# Altium PCB DATN_IoT_Node_PCB.PcbDoc
Units mil, origin at the board's own origin, x right, y up, seen from the top; angles counter-clockwise.
Board outline 3925 x 3935 mil, 2 copper layers (Top Layer, Bottom Layer); 113 components, 71 nets, 345 pads, 45 vias.
Unrouted connection lines stored in the file: 1.
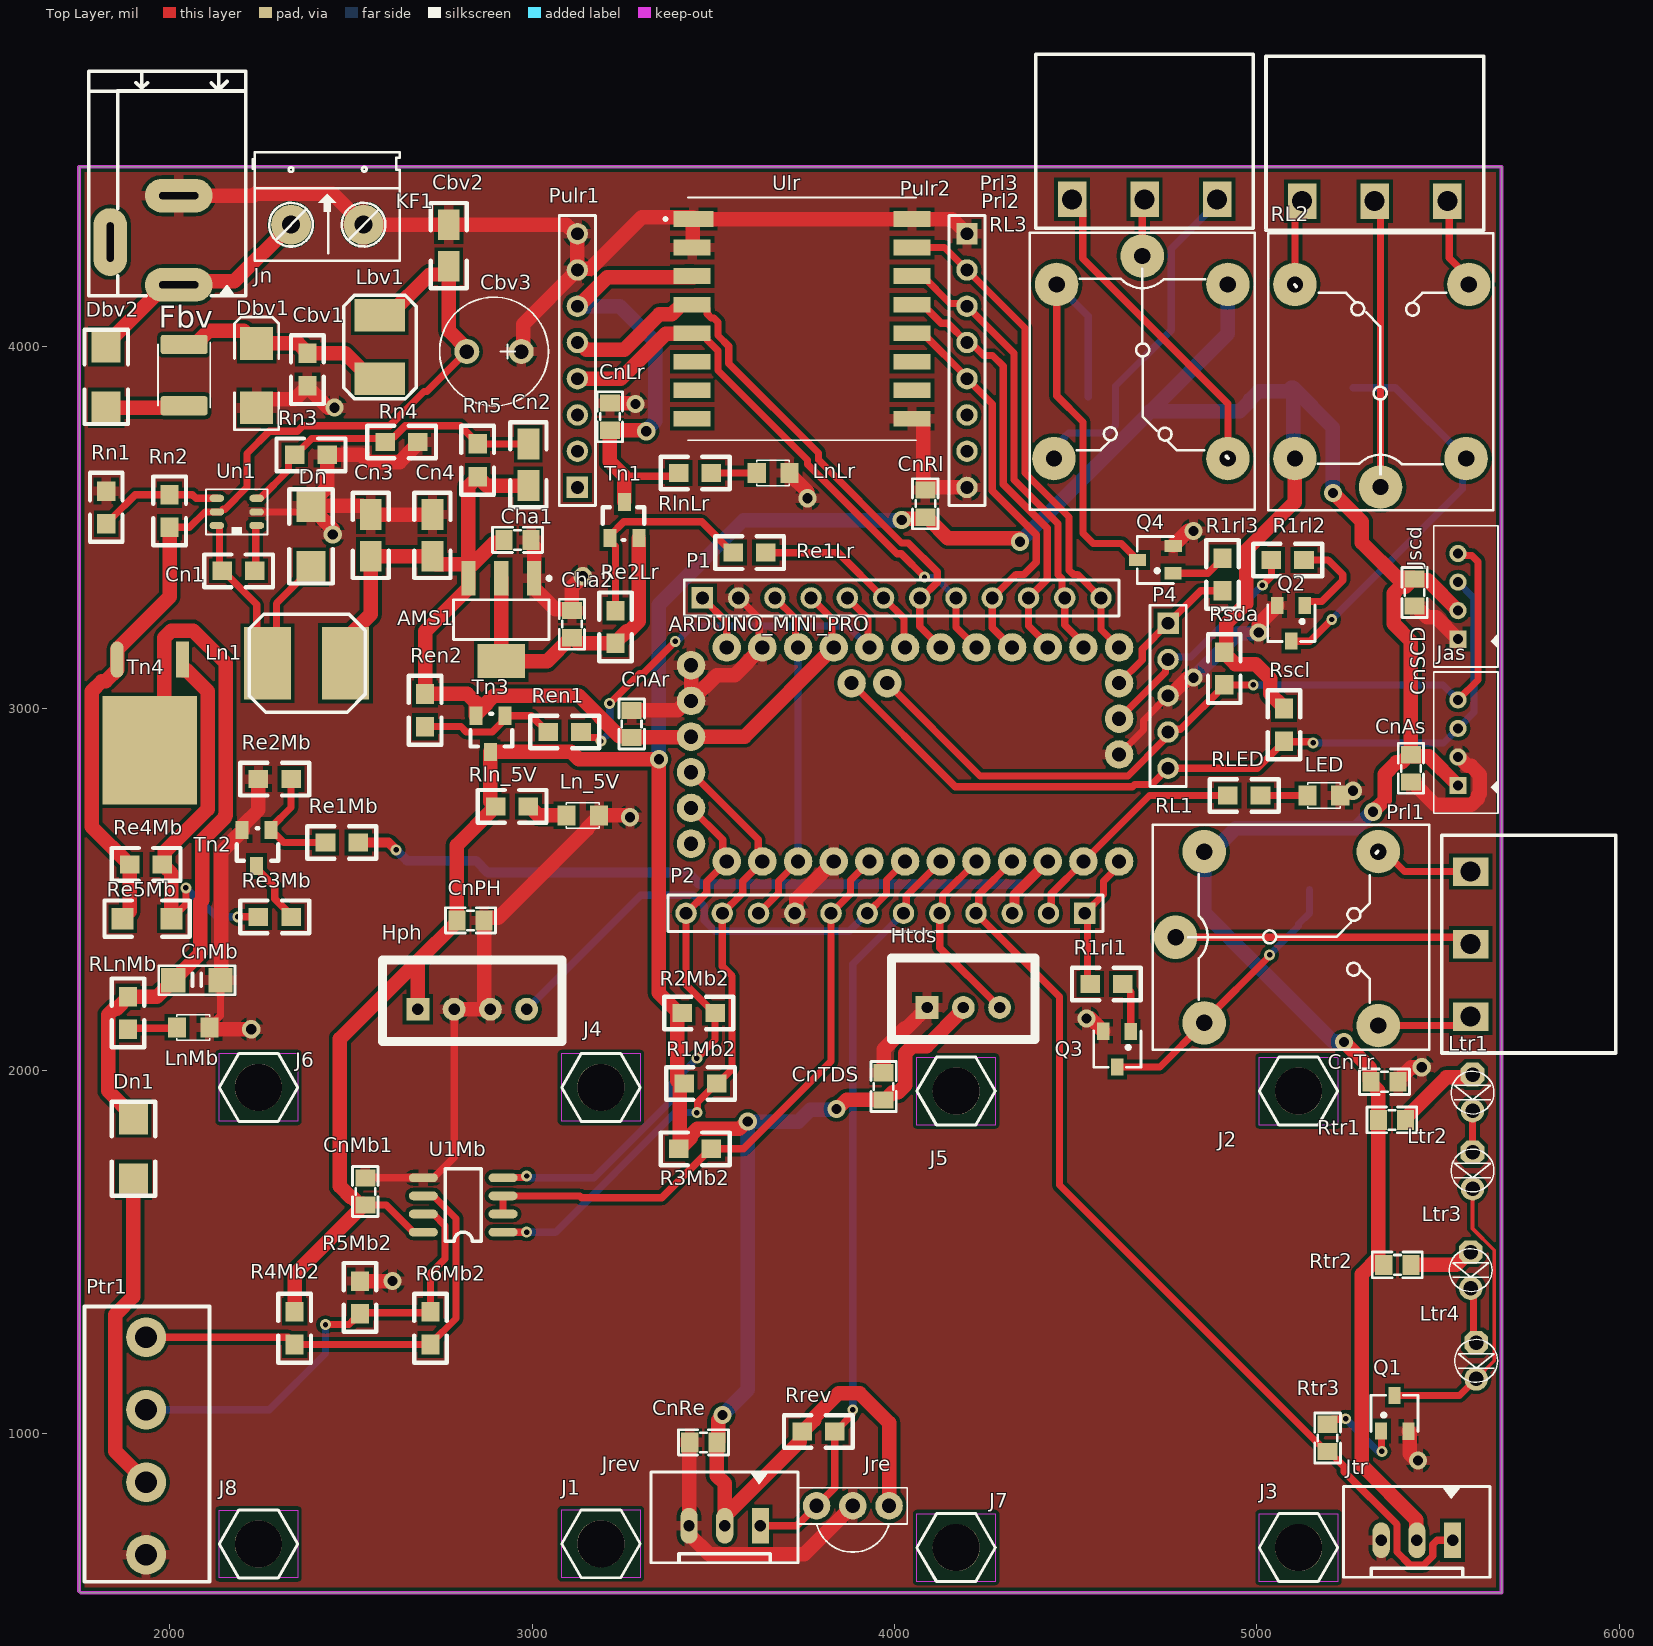
[diagram p0: Top Layer view]
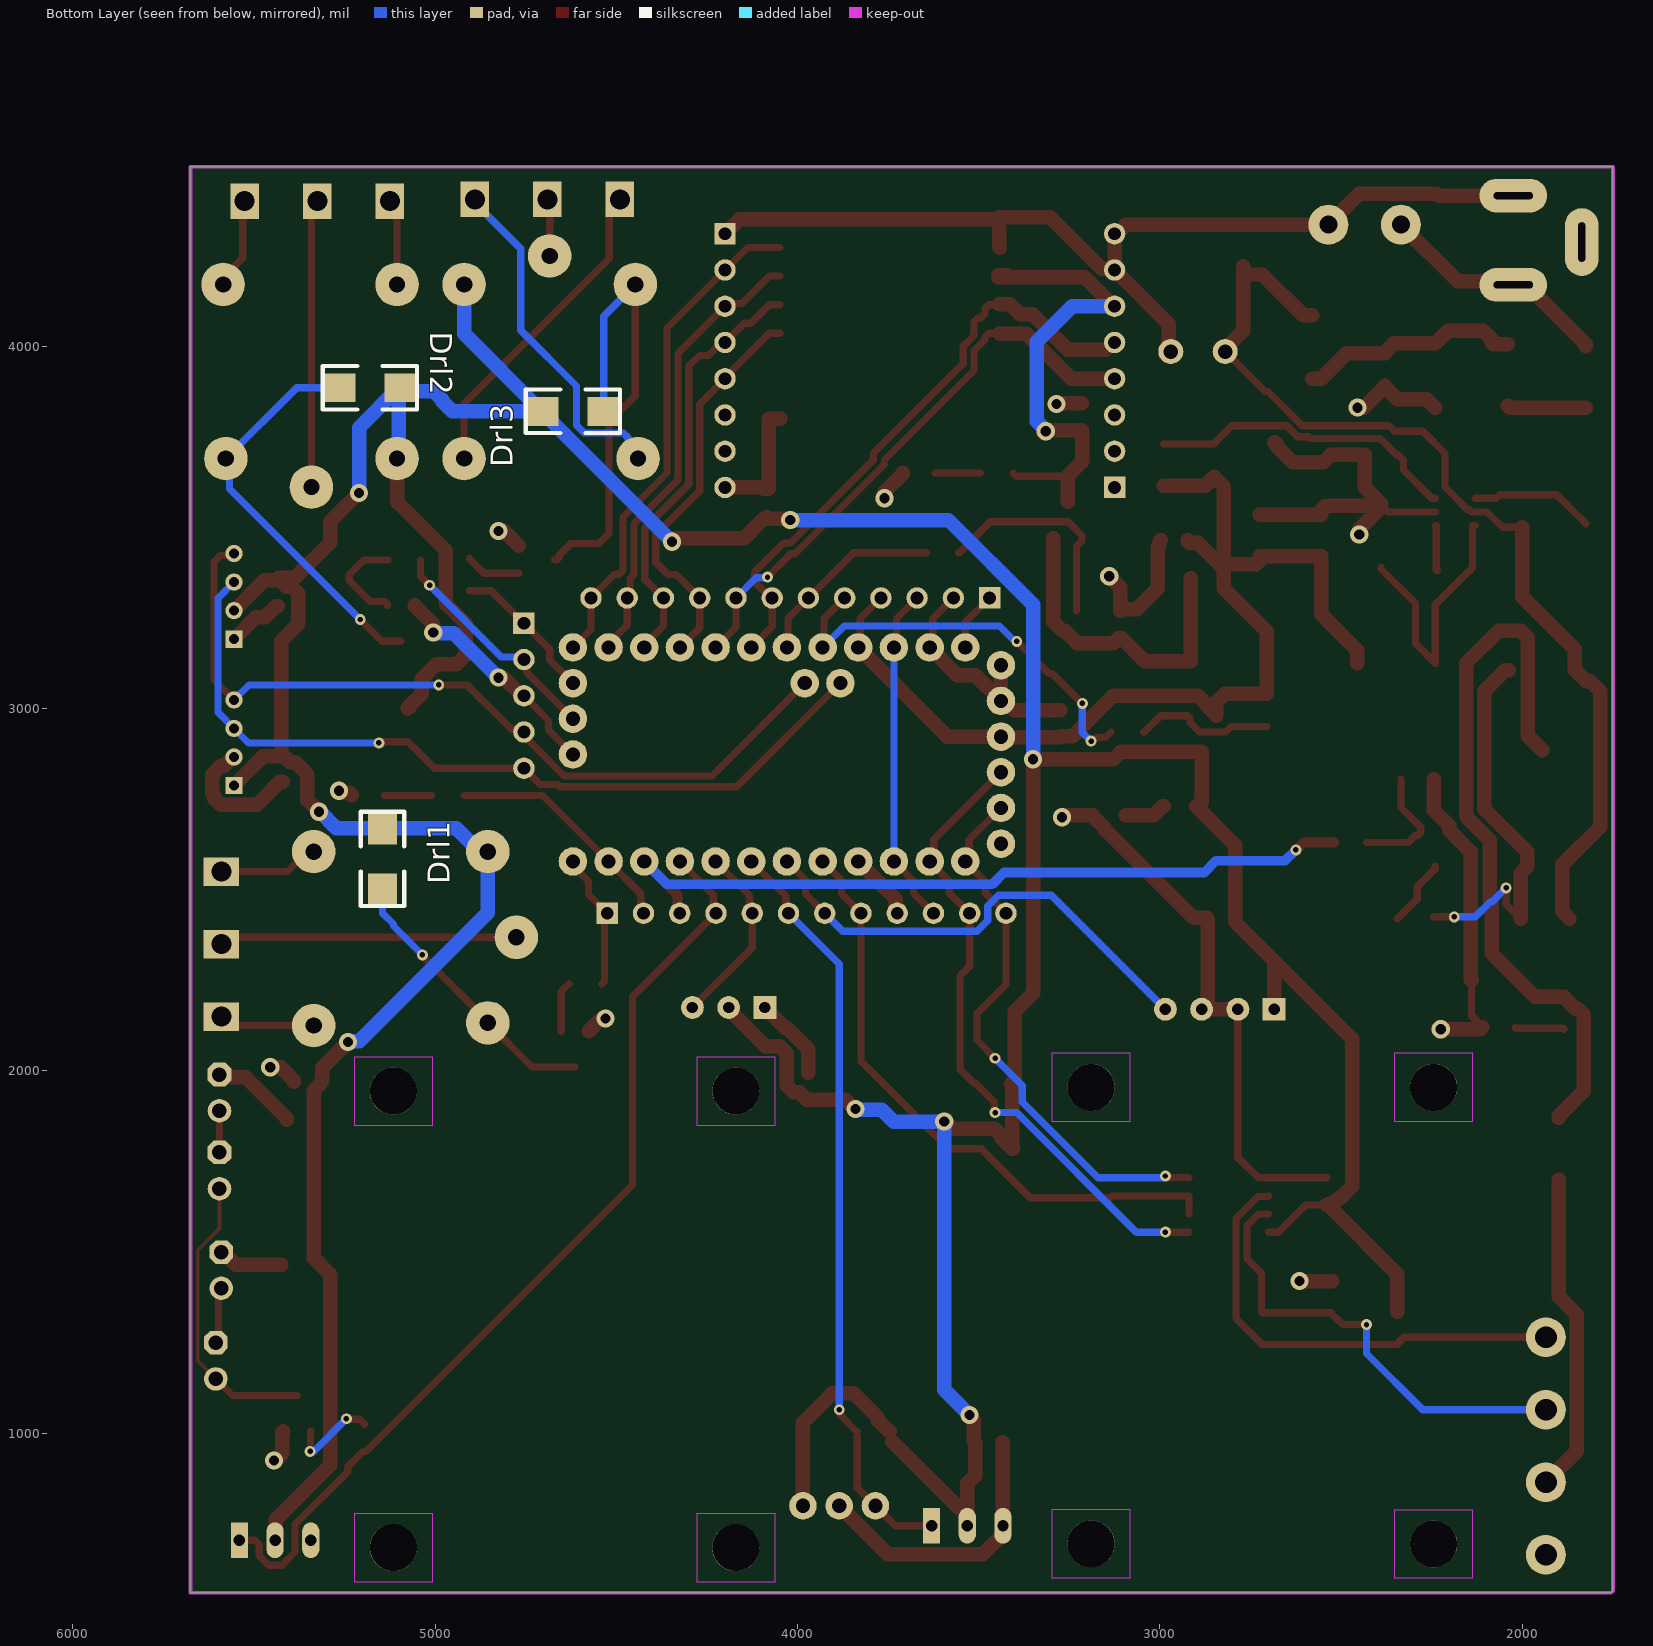
[diagram p1: Bottom Layer view, seen from below]

## Layer stack, top to bottom
Top Solder: solder mask 0.4, Solder Resist, Dk 3.5
Top Layer: signal copper 1.4
Dielectric 1: dielectric 12.6, FR-4, Dk 4.8
Bottom Layer: signal copper 1.4
Bottom Solder: solder mask 0.4, Solder Resist, Dk 3.5

## Board outline
1750,565 1750,4495 5675,4495 5675,560 1755,560

## Design rules (kind name [scope] priority, off if disabled: settings)
Clearance Clearance_1 [All] p1: gap=10 ignorepadtopadclearanceinfootprint=FALSE except(0: Arc-Hole Track-Hole SMDPad-Hole THPad-Fill THPad-Poly THPad-Region THPad-Hole Via-Hole Fill-Hole Poly-Hole Region-Hole Text-Hole)
Clearance Clearance_GND [InNet('GND')] p2: gap=13 ignorepadtopadclearanceinfootprint=FALSE except(0: Arc-Hole Track-Hole SMDPad-Hole THPad-Hole Via-Hole Fill-Hole Poly-Hole Region-Hole Text-Hole)
HoleSize [All] p1: absolutevalues=TRUE maxlimit=200 minlimit=1 maxpercent=80.000 minpercent=20.000
MinimumSolderMaskSliver [All] p1: minsoldermaskwidth=0
PolygonConnect [All] p1: connectstyle=Relief reliefconductorwidth=27 reliefentries=4 polygonreliefangle="90 Angle" airgapwidth=10
RoutingVias [All] p1: holewidth=15 width=30 viastyle="Through Hole" minholewidth=10 minwidth=20 maxholewidth=48 maxwidth=150
SilkToSilkClearance [All] p1: silktosilkclearance=0
SilkToSolderMaskClearance [IsPad] p1: minsilkscreentomaskgap=0 clearancetoexposedcopper=TRUE
SolderMaskExpansion SolderMaskExpansion_1 [All] p1: expansion=4 istentingtop=FALSE
SolderMaskExpansion [IsVia] p2: expansion=4 istentingtop=FALSE
Width [All] p1: maxlimit=40 minlimit=10 preferedwidth=20
26 further rules are at their usual default settings.

## Components (designator, comment, footprint, x,y, rotation, side; value= is the part's Value field where it differs from the comment)
AMS1 "AMS1117-3.3V" SOT223 2915,3245 r180 top value="AMS1117-3.3V SOT223"
ARDUINO_MINI_PRO "ARDUINO_MINI_PRO" ARDUINO_MINI_PRO 3596.14,2676.3 r90 top
Cbv1 "104" 0805c 2380,3980 r270 top value=100pF
Cbv2 "CAP" 1206e 2770,4220 r90 top
Cbv3 "CAPACITOR" cc15r15 2820,3985 r0 top
Cha1 "47uF" "Cap 0805" 2960,3465 r0 top
Cha2 "33uF" "Cap 0805" 3109.87,3232.43 r90 top
Cn1 "Cap" 0805c 2235,3380 r180 top value=100pF
Cn2 "100pF" 1206e 2990,3615 r90 top
Cn3 "CAP" 1206e 2555,3420 r90 top
Cn4 "CAP" 1206e 2725,3420 r90 top
CnAr "CAP" "Cap 0805" 3274.87,2957.23 r90 top
CnAs "CAP" "Cap 0805" 5425,2835 r270 top
CnLr "CAP" "Cap 0805" 3215,3805 r90 top
CnMb "CAP" "Cap 1206" 2075,2250 r0 top
CnMb1 "CAP" "Cap 0805" 2539.87,1667.23 r90 top
CnPH "CAP" "Cap 0805" 2830,2415 r0 top
CnRe "CAP" "Cap 0805" 3472.77,974.87 r180 top
CnRl "CAP" "Cap 0805" 4085,3565 r90 top
CnSCD "CAP" "Cap 0805" 5435,3320 r270 top
CnTDS "CAP" "Cap 0805" 3969.87,1957.23 r90 top
CnTr "CAP" "Cap 0805" 5352.23,1970.13 r0 top
Dbv1 "DIODE" smb 2240,3918.58 r90 top
Dbv2 "DIODE" sma 1825,4000 r270 top
Dn "Diode" Sma 2390,3560 r270 top
Dn1 "Diode" Sma 1900,1870 r270 top
Drl1 "DIODE" sma 5145,2500 r90 bottom
Drl2 "DIODE" sma 5265,3885 r180 bottom
Drl3 "DIODE" sma 4535,3820 r0 bottom
Fbv "2A 24V" "Cau chi tu phuc hoi 2A 24V SMD1812" 2040,3920 r270 top
Hph "Header 4P 2.54 Duc Thang" XH2.54M-4 2685,2170 r0 top
Htds "Header 3P 2.54 Duc Thang" XH2.54M-3 4090,2175 r0 top
J1 "SO-3015-03-03-02-N" SAMTEC_SO-3015-03-03-02-N#1 3190,695 r0 top locked
J2 "SO-3015-03-03-02-N" SAMTEC_SO-3015-03-03-02-N#1 5115,1944.37 r0 top locked
J3 "SO-3015-03-03-02-N" SAMTEC_SO-3015-03-03-02-N#2 5115,684.53 r0 top locked
J4 "SO-3015-03-03-02-N" SAMTEC_SO-3015-03-03-02-N#1 3190,1954.37 r0 top locked
J5 "SO-3015-03-03-02-N" SAMTEC_SO-3015-03-03-02-N#1 4170.12,1944.37 r0 top locked
J6 "SO-3015-03-03-02-N" SAMTEC_SO-3015-03-03-02-N#1 2245.12,1954.37 r0 top locked
J7 "SO-3015-03-03-02-N" SAMTEC_SO-3015-03-03-02-N#1 4170.12,684.53 r0 top locked
J8 "SO-3015-03-03-02-N" SAMTEC_SO-3015-03-03-02-N#1 2245.12,694.53 r0 top locked
Jas "B4B-PH-K-S(LF)(SN)" CON4_78_B4B-PH-K-S(LF)(SN) 5555,2787.52 r270 top
Jn "DC -JACK" CON3_129_PJ-002A_TH_RA 2025,4169 r270 top
Jre "TSOP1838" TSOP1838 3885,800 r0 top
Jrev "B3B-XH-A(LF)(SN)" CON3_100_B3B-XH-A_TH_ST 3338.66,882.8 r270 top
Jscd "B4B-PH-K-S(LF)(SN)" CON4_78_B4B-PH-K-S(LF)(SN) 5555,3191.26 r270 top
Jtr "B3B-XH-A(LF)(SN)" CON3_100_B3B-XH-A_TH_ST 5248.66,842.8 r270 top
KF1 "CON 2 KF301" "Con 2 KF301 5.08" 2335,4335 r0 top
Lbv1 "INDUCTOR" IND_SPR05x 2580,3910 r90 top
LED "LED 0805" LED-0805-Yellow 5140,2760 r0 top
Ln1 "Inductor" IND_SPR06xe 2270,3125 r0 top value=10mH
Ln_5V "LED 0805" LED-0805-Red 3095,2705 r0 top
LnLr "LED 0805" LED-0805-Orange 3620,3650 r0 top
LnMb "LED 0805" LED-0805-Yellow 2020,2120 r0 top
Ltr1 "LED 3mm" LED-3MM-RED 5595,1990 r270 top
Ltr2 "LED 3mm" LED-3MM-RED 5595,1775 r270 top
Ltr3 "LED 3mm" LED-3MM-RED 5590,1500 r270 top
Ltr4 "LED 3mm" LED-3MM-RED 5605,1250 r270 top
P1 "Header 12" HDR1X12 3470,3305 r0 top
P2 "Header 12" HDR1X12 4525,2435 r180 top
P4 "Header 5" HDR1X5 4755,3235 r270 top
Prl1 "CON 3 EDG5.08" "CON 3 3EDG5.08" 5590,2550 r270 top
Prl2 "CON 3 EDG5.08" "CON 3 3EDG5.08" 5125,4400 r0 top
Prl3 "CON 3 EDG5.08" "CON 3 3EDG5.08" 4490,4405 r0 top
Ptr1 "Header 4" giacdung4 1935,865 r90 top
Pulr1 "Header 8" HDR1X8 3125,3610 r90 top locked
Pulr2 "Header 8" HDR1X8 4200,4310 r270 top locked
Q1 "HF" SOT-23 5380,1055 r0 top value=C9014
Q2 "HF" SOT-23 5095,3235 r180 top value=C9014
Q3 "HF" SOT-23 4615,2060 r180 top value=C9014
Q4 "HF" SOT-23 4720,3410 r90 top value=C9014
R1Mb2 "Res1" 0805c 3420,1965 r0 top value=10K
R1rl1 "Res1" 0805c 4540,2240 r0 top value=1K
R1rl2 "Res1" 0805c 5040,3410 r0 top value=1K
R1rl3 "Res1" 0805c 4905,3325 r90 top value=1K
R2Mb2 "Res1" 0805c 3415,2160 r0 top value=10K
R3Mb2 "Res1" 0805c 3405,1785 r0 top value=10K
R4Mb2 "Res1" 0805c 2345,1335 r270 top value=20K
R5Mb2 "Res1" 0805c 2525,1420 r270 top value=20K
R6Mb2 "Res1" 0805c 2720,1335 r270 top value=120
Re1Lr "10k" 0805c 3645,3430 r180 top
Re1Mb "10k" 0805c 2520,2630 r180 top
Re2Lr "1k" 0805c 3230,3270 r270 top
Re2Mb "1k" 0805c 2245,2805 r0 top
Re3Mb "10k" 0805c 2335,2425 r180 top
Re4Mb "10k" 0805c 1890,2570 r0 top
Re5Mb "z10V" 1206 1870,2420 r0 top
Ren1 "10k" 0805c 3135,2935 r180 top
Ren2 "1k" 0805c 2705,2950 r90 top
RL1 "Relay" "Relay 5 Chan SRD" 4775.94,2368.78 r0 top
RL2 "Relay" "Relay 5 Chan SRD" 5341.22,3610.94 r90 top
RL3 "Relay" "Relay 5 Chan SRD" 4683.78,4248.74 r270 top
RLED "Res1" 0805c 5010,2760 r180 top value=1K
Rln_5V "Res1" 0805c 2990,2730 r180 top value=1K
RlnLr "Res1" 0805c 3495,3650 r180 top value=1K
RLnMb "Res1" 0805c 1885,2115 r90 top value=1K
Rn1 "Res1" 0805c 1825,3600 r270 top value=1K
Rn2 "Res1" 0805c 2000,3500 r90 top value=1K
Rn3 "Res1" 0805c 2435,3700 r180 top value=1K
Rn4 "Res1" 0805c 2685,3735 r180 top value=1K
Rn5 "Res1" 0805c 2850,3640 r90 top value=1K
Rrev "Res1" 0805c 3835,1005 r180 top value=1K
Rscl "Res1" 0805c 5075,2910 r90 top value=1K
Rsda "Res1" 0805c 4910,3065 r90 top value=1K
Rtr1 "30R" "tro smd 0805" 5372.43,1867.39 r0 top
Rtr2 "30R" "tro smd 0805" 5387.43,1467.39 r0 top
Rtr3 "220R" "tro smd 0805" 5192.61,987.23 r90 top
Tn1 "ao3401" sot23-3 3215,3470 r0 top
Tn2 "c1815" sot23-3 2280,2665 r180 top
Tn3 "ao3401" sot23-3 2925,2980 r180 top
Tn4 "CON3" dpak 2035,3135 r180 top
U1Mb "MAX485" so-8 2920,1555 r180 top
Ulr "RA-02_LORA" MODULE_RA-02_LORA 3745,4075 r0 top
Un1 "AOZ1282CI" Sot23-6 2180.59,3537.4 r180 top

## Footprints (in the part's own frame and the unit in brackets; to place one, negate y for a bottom-side part, rotate by r counter-clockwise, add the part's x,y. Pads: shape width x height; smd on the part's side, far side on the other; paste and mask are expansions set on the pad)
0805c [mil]
  rect 54x50 smd: 1(0,0) 2(90,0)
  silkscreen extent -50,-45 140,45
1206 [mil]
  rect 60x60 smd: 1(0,0) 2(135,0)
  silkscreen extent -50,-50 185,50
1206e [mil]
  rect 85x60 smd: 1(0,0) 2(115,0)
  silkscreen extent -60,-50 175,50
ARDUINO_MINI_PRO [mm]
  round 2 hole 1: 2(-2.5,-8.5) 3(-2.5,-11) 4(-2.5,-13.5) 5(-2.5,-16) 6(-2.5,-18.5) 7(-2.5,-21) 8(-2.5,-23.5) 9(-2.5,-26) 10(12.5,-26) 11(12.5,-23.5) 12(12.5,-21) 13(12.5,-18.5) A0(12.5,-16) A1(12.5,-13.5) A2(12.5,-11) A3(12.5,-8.5) A4(10,-9.75) A5(10,-7.25) A6(7.5,-26) A7(10,-26) DTR(-1.25,4) GND(-2.5,-6) GND(5,-26) GND(8.75,4) GND(11.25,4) GND(12.5,-1) RAW(12.5,1.5) RST(-2.5,-3.5) RST(12.5,-3.5) RX(-2.5,-1) RX(3.75,4) TX(-2.5,1.5) TX(1.25,4) VCC(6.25,4) VCC(12.5,-6)
"Cap 0805" [mm] "Compoment SMD 80x50mil"
  rect 1.2x1.4 smd: 1(-0.946,-0.003) 2(0.954,-0.003)
  silkscreen extent -1.75,-0.89 1.75,0.89, body extent -0.97,-0.61 1.03,0.64, height 1.23
"Cap 1206" [mm]
  rect 1.7x1.7 smd: 1(-1.65,0) 2(1.65,0)
  silkscreen extent -2.67,-1.02 2.67,1.02, body extent -1.6,-0.8 1.6,0.8, height 1.02
"Cau chi tu phuc hoi 2A 24V SMD1812" [mm]
  rrect25% 1.34x3.29 smd: 1(-2.15,0) 2(2.15,0)
  silkscreen extent -2.28,-1.83 2.28,1.83, body extent -2.27,-1.62 2.27,1.62, height 1.25
cc15r15 [mil]
  round 69 hole 40: 1(0,0) 2(150,0)
  silkscreen extent -75,-150 225,150
CON3_100_B3B-XH-A_TH_ST [mm] "Connector Header"
  rect 2.5x1.2 hole 0.8: 1(3.5,7.4)
  oval 2.5x1.2 hole 0.8: 2(3.5,4.9) 3(3.5,2.4)
  silkscreen extent -0.25,-0.25 6.1,10.03, body extent 0.02,-0.05 5.78,9.85, height 7.01
CON3_129_PJ-002A_TH_RA [mm] "DC JACK"
  oval 2.35x4.75 hole 0.5 slot 2.75 at 90 deg: 1(0,0) 2(-6.248,0)
  oval 4.75x2.35 hole 2.75 slot 0.5 at 90 deg: 3(-2.997,-4.801)
  silkscreen extent -14.98,-6.3 0.81,4.7, body extent -13.92,-4.93 0.48,4.47, height 11.01
CON4_78_B4B-PH-K-S(LF)(SN) [mm] "JST TH"
  rect 1.208x1.208 hole 0.7: 1(0,0)
  round 1.208 hole 0.7: 2(-2,0) 3(-4,0) 4(-6,0)
  silkscreen extent -7.95,-1.7 1.95,2.8, body extent -7.95,-1.7 1.95,2.8, height 6
"Con 2 KF301 5.08" [mil]
  round 110 hole 50: 1(0,0) 2(200,0)
  silkscreen extent -106,-100 300,200, body extent -45,-97 255,190, height 335
"CON 3 3EDG5.08" [mm]
  rect 2x2.5 hole 1.4: 1(0,0) 2(5.08,0) 3(10.173,0)
  silkscreen extent -2.54,-2.03 12.71,10.16, body extent -2.5,-1.75 12.67,10.25, height 3.15
dpak [mil]
  rect 36x100 smd: 1(0,0)
  rect 260x300 smd: 2(90,250)
  oval 36x100 smd: 3(180,0)
giacdung4 [mil]
  round 110 hole 60: 1(-200,0) 2(0,0) 3(200,0) 4(400,0)
  silkscreen extent -275,-175 485,170
HDR1X5 [mm] "Connector; Header; 5 Position"
  rect 1.5x1.5 hole 0.9: 1(0,0)
  round 1.5 hole 0.9: 2(2.54,0) 3(5.08,0) 4(7.62,0) 5(10.16,0)
  silkscreen extent -1.27,-1.27 11.43,1.27
HDR1X8 [mm] "Connector; Header; 8 Position"
  rect 1.5x1.5 hole 0.9: 1(0,0)
  round 1.5 hole 0.9: 2(2.54,0) 3(5.08,0) 4(7.62,0) 5(10.16,0) 6(12.7,0) 7(15.24,0) 8(17.78,0)
  silkscreen extent -1.27,-1.27 19.05,1.27
HDR1X12 [mm] "Connector; Header; 12 Position"
  rect 1.5x1.5 hole 0.9: 1(0,0)
  round 1.5 hole 0.9: 2(2.54,0) 3(5.08,0) 4(7.62,0) 5(10.16,0) 6(12.7,0) 7(15.24,0) 8(17.78,0) 9(20.32,0) 10(22.86,0) 11(25.4,0) 12(27.94,0)
  silkscreen extent -1.27,-1.27 29.21,1.27
IND_SPR05x [mil]
  rect 90x140 smd: 1(0,0) 2(175,0)
  silkscreen extent -55,-100 230,100
IND_SPR06xe [mil]
  rect 130x200 smd: 1(0,0) 2(215,0)
  silkscreen extent -50,-135 270,135
LED-3MM-RED [mil]
  oct 65x65 hole 40: 1(0,0)
  round 65 hole 40: 2(100,0)
  silkscreen extent -9,-59 109,59, body extent -27,-77 117,80, height 181
LED-0805-Orange [mil]
  rect 50x55 smd: 1(0,0) 2(90,0)
  silkscreen extent 0,-35 90,35, body extent 5,-25 85,25, height 43
LED-0805-Red [mil]
  rect 50x55 smd: 1(0,0) 2(90,0)
  silkscreen extent 0,-35 90,35, body extent 5,-25 85,25, height 43
LED-0805-Yellow [mil]
  rect 50x55 smd: 1(0,0) 2(90,0)
  silkscreen extent 0,-35 90,35, body extent 5,-25 85,25, height 43
MODULE_RA-02_LORA [mm]
  rect 2.8x1.1 smd: 1(-7.6,7)
  rect 2.6x1.1 smd: 2(-7.7,5) 3(-7.7,3) 4(-7.7,1) 5(-7.7,-1) 6(-7.7,-3) 7(-7.7,-5) 8(-7.7,-7) 9(7.7,-7) 10(7.7,-5) 11(7.7,-3) 12(7.7,-1) 13(7.7,1) 14(7.7,3) 15(7.7,5) 16(7.7,7)
  silkscreen extent -9.68,-8.5 8,8.5
"Relay 5 Chan SRD" [mil] "Relay SPDT, 5 pin, 10A,W 650mil, L 800mil, H 800mil"
  round 120 hole 45: 1(0,0) 2(559.06,236.22) 3(559.06,-243.78) 4(78.74,-236.22) 5(78.74,236.22)
  silkscreen extent -63,-311 700,310, body extent -55,-306 697,304, height 602
SAMTEC_SO-3015-03-03-02-N#1 [mm]
  round 3.3 hole 3.3 unplated mask+0: ""(0,0)
  Keep-Out Layer region: 2.75,-2.38 -2.75,-2.38 -2.75,2.38 2.75,2.38
  Keep-Out Layer region: 2.75,-2.38 -2.75,-2.38 -2.75,2.38 2.75,2.38
  silkscreen extent -2.75,-2.38 2.75,2.38
SAMTEC_SO-3015-03-03-02-N#2 [mm]
  round 3.3 hole 3.3 unplated: ""(0,0)
  Keep-Out Layer region: 2.75,-2.38 -2.75,-2.38 -2.75,2.38 2.75,2.38
  Keep-Out Layer region: 2.75,-2.38 -2.75,-2.38 -2.75,2.38 2.75,2.38
  silkscreen extent -2.75,-2.38 2.75,2.38
sma [mil]
  rect 90x80 smd: 1(0,0) 2(170,0)
  silkscreen extent -45,-60 215,60
Sma [mil]
  rect 90x80 smd: 1(0,0) 2(170,0)
  silkscreen extent -45,-60 215,60
smb [mm] "DO-214-AA/SMB; 2 C-Bend Leads; Body 5.3 x 3.6 mm, inc. leads (LxW)"
  rect 2.3x2.3 smd: 1(-2.25,0) 2(2.25,0)
  silkscreen extent -3.8,-1.55 4.1,1.55
so-8 [mil]
  oval 80x24 smd: 1(0,0) 2(0,-50) 3(0,-100) 4(0,-150) 5(220,-150) 6(220,-100) 7(220,-50) 8(220,0)
  silkscreen extent 60,-175 160,25
sot23-3 [mil]
  rect 36x50 smd: 1(0,0) 2(80,0) 3(40,100)
  silkscreen extent -20,-5 95,85
Sot23-6 [mil]
  oct 40x20 smd: 1(-59.41,32.4)
  oval 40x20 smd: 2(-59.41,-4.6) 3(-59.41,-42.6) 4(50.59,-42.6) 5(50,-5) 6(50.59,32.4)
  silkscreen extent -89,-68 81,57, body extent -64,-64 54,54, height 51
SOT223 [mm]
  rect 1x2.4 smd: 1(-2.3,-2.9) 2(0,-2.9) 3(2.3,-2.9)
  rect 3.3x2.4 smd: 4(0,2.9)
  silkscreen extent -3.48,-3.02 3.35,1.4, body extent -3.25,-3.56 3.25,3.4, height 1.68
SOT-23 [mm] "SOT 23 _ 1-3-2"
  rect 0.85x1.2 smd: 1(-0.94,-1.245) 2(0.985,-1.25) 3(0.005,1.25)
  silkscreen extent -1.65,-1.27 1.65,1.27, body extent -1.47,-1.33 1.53,1.17, height 1.06
"tro smd 0805" [mm]
  rect 1.2x1.4 smd: 1(-0.946,-0.061) 2(0.954,-0.061)
  silkscreen extent -1.75,-0.97 1.75,0.84, body extent -1.56,-0.76 1.44,0.64, height 0.53
TSOP1838 [mil]
  round 76 hole 39.37: 1(-100,0) 2(0,0) 3(100,0)
  silkscreen extent -150,-128 150,50, body extent -118,-159 118,61, height 404
XH2.54M-3 [mm]
  rect 1.6x1.6 hole 0.8: 1(0,0)
  round 1.6 hole 0.8: 2(2.54,0) 3(5.08,0)
  silkscreen extent -2.48,-2.26 7.56,3.46, body extent -2.48,-2.26 7.56,3.48, height 6.91
XH2.54M-4 [mm]
  rect 1.6x1.6 hole 0.8: 1(0,0)
  round 1.6 hole 0.8: 2(2.54,0) 3(5.08,0) 4(7.62,0)
  silkscreen extent -2.48,-2.26 10.1,3.46, body extent -2.48,-2.26 10.1,3.48, height 6.91

## Part data
AMS1: library part "AMS1117 SMD", "Dán", Chung_Loai=Dán, Don_Vi=Con, Ma_Hang=MH000596
Cbv1: library part Cap, "Capacitor", LatestRevisionDate=17-Jul-2002, LatestRevisionNote="Re-released for DXP Platform.", PackageReference=RAD-0.3, Published=8-Jun-2000, Publisher="Altium Limited"
Cbv2 Cbv3 Cn1 Cn3 Cn4: "Capacitor"
  Cn1: LatestRevisionDate=17-Jul-2002, LatestRevisionNote="Re-released for DXP Platform.", PackageReference=RAD-0.3, Published=8-Jun-2000, Publisher="Altium Limited"
Cha1 Cha2 CnAr CnAs CnLr CnMb1 CnPH CnRe CnRl CnSCD CnTDS CnTr: library part "Cap 0805", "Capacitor SMD 0805"
Cn2: library part CAP, "Capacitor"
CnMb: library part "Cap 1206", "Capacitor SMD 1206"
Dbv1 Dbv2 Drl1 Drl2 Drl3: "Diode"
Dn Dn1: "Default Diode", Code_JEDEC=DO-214-AB, LatestRevisionDate=17-Jul-2002, LatestRevisionNote="Re-released for DXP Platform.", PackageReference=SMC, PackageVersion=Sep-1996, Published=8-Jun-2000, Publisher="Altium Limited"
Fbv: library part "Cau chi tu phuc hoi 2A 24V SMD1812", "2A 24V SMD1812", Ma_Hang=MH010033, Ten="Cầu Chì Tự Phục Hồi 2A 24V SMD1812"
Hph Htds KF1 Prl1 Prl2 Prl3: "Cắm", Chung_Loai=Cắm, Don_Vi=Con
  Hph: Ma_Hang=MH001285, Ten_Linh_Kien="Header 4P XH2.54-4P Đực Thẳng"
  Htds: Ma_Hang=MH001292, Ten_Linh_Kien="Header 3P XH2.54-3P Đực Thẳng"
  KF1: Ma_Hang=MH000987, Ten_Linh_Kien="CON 2 KF301-2P 5.08MM Xanh Dương"
  Prl1 Prl2 Prl3: Ma_Hang=MH000760, Ten_Linh_Kien="CON 3 2EDG5.08-3P 5.08MM ( Xanh Cong)"
J1 J2 J3 J4 J5 J6 J7 J8: "Precision Board Stacking Standoff", Package=None, Check_prices=https://www.snapeda.com/parts/SO-3015-03-03-02-N/Samtec/view-part/?ref=eda, MF=Samtec, MP=SO-3015-03-03-02-N, SnapEDA_Link=https://www.snapeda.com/parts/SO-3015-03-03-02-N/Samtec/view-part/?ref=snap
Jas Jscd: library part CON-PLG_4X1-78-ST-TH, "Connector Header Through Hole 4 position 0.079\" (2.00mm)", Alternate Part Number-1=NA, Case/Package=TH, Crimp Part Number=ASPHSPH24K51, Manufacturer=JST, Mating Part Number=PHR-4, Manufacturer Part Number=B4B-PH-K-S(LF)(SN), Supplier Part Number-1=NA, Supplier-1="SP Road"
Jn: library part CON-PLG_3X1-228-DC_JACK, "3 Pins, 1 Row 228mil Pitch, right angle Connector, male", Alternate Part Number-1=NA, Case/Package=TH-CON, Manufacturer=JST, Manufacturer Part Number=PJ-002A, Supplier Part Number-1=NA, Supplier-1="SP ROAD"
Jre: "IR Remote Receiver 38KHz 35m 3-Pin", Package=None, Check_prices=https://www.snapeda.com/parts/TSOP1838/Vishay/view-part/?ref=eda, MF=Vishay, MP=TSOP1838, SnapEDA_Link=https://www.snapeda.com/parts/TSOP1838/Vishay/view-part/?ref=snap
Jrev Jtr: library part CON-PLG_3X1-100-ST-TH, "3 Pins, 1 Row 2.54mm Pitch, straight Connector, male", Alternate Part Number-1=NA, Case/Package=TH-CON, Crimp Part Number=ASXHSXH22K51, Manufacturer=CUI, Mating Part Number=XHP-3, Manufacturer Part Number=B3B-XH-A(LF)(SN), Supplier Part Number-1=B3B-XH-A(LF)(SN), Supplier-1=ARROW
LED: library part "LED 0805 Trang", "Dán", Chung_Loai=Dán, Don_Vi=Con, Ma_Hang=MH002946, Ten_Linh_Kien="LED 0805 Màu Trắng ( White)"
Ln_5V: library part "LED 0805 Do", "Dán", Chung_Loai=Dán, Don_Vi=Con, Ma_Hang=MH000897, Ten_Linh_Kien="LED 0805 Màu Đỏ (Red)"
LnLr: library part "LED 0805 Cam", "Dán", Chung_Loai=Dán, Don_Vi=Con, Ma_Hang=MH002328, Ten_Linh_Kien="LED 0805 Màu Cam ( Orange)"
LnMb: library part "LED 0805 Vang", "Dán", Chung_Loai=Dán, Don_Vi=Con, Ma_Hang=MH002329, Ten_Linh_Kien="LED 0805 Màu Vàng ( Yellow)"
Ltr1 Ltr2 Ltr3 Ltr4: library part "LED 3mm Do", "Cắm", Chung_Loai=Cắm, Don_Vi=Con, Ma_Hang=MH003892, Ten_Linh_Kien="Led 3MM Phủ Đỏ (10c)"
P1 P2: "Header, 12-Pin", LatestRevisionDate=17-Jul-2002, LatestRevisionNote="Re-released for DXP Platform.", Publisher="Altium Limited"
P4: "Header, 5-Pin", LatestRevisionDate=17-Jul-2002, LatestRevisionNote="Re-released for DXP Platform.", Publisher="Altium Limited"
Ptr1: "Header, 4-Pin", LatestRevisionDate=17-Jul-2002, LatestRevisionNote="Re-released for DXP Platform.", Publisher="Altium Limited"
Pulr1 Pulr2: "Header, 8-Pin", LatestRevisionDate=17-Jul-2002, LatestRevisionNote="Re-released for DXP Platform.", Publisher="Altium Limited"
Q1 Q2 Q3 Q4: library part "Trans C1815 HF SMD", "SOT-23"
R1Mb2 R1rl1 R1rl2 R1rl3 R2Mb2 R3Mb2 R4Mb2 R5Mb2 R6Mb2 RLED Rln_5V RlnLr RLnMb Rn1 Rn2 Rn3 Rn4 Rn5 Rrev Rscl Rsda: "Resistor", LatestRevisionDate=17-Jul-2002, LatestRevisionNote="Re-released for DXP Platform.", PackageReference=AXIAL-0.3, Published=8-Jun-2000, Publisher="Altium Limited"
Re1Lr Re1Mb Re2Lr Re2Mb Re3Mb Re4Mb Re5Mb Ren1 Ren2: library part RES2
RL1 RL2 RL3: library part "Relay 5 Chan SRD", "Relay 5 Chan", Ma_Hang=MH009374, Ten="Relay 5V10A SRD-05VDC-SL-C Chính Hãng"
Rtr1 Rtr2: library part "Tro 0805 5% 30R", "Dán", Chung_Loai=Dán, Don_Vi=Con, Ma_Hang=MH005315, So_Chan=2, Ten_Linh_Kien="Trở 0805 5% 30R"
Rtr3: library part "Tro 0805 5% 220R", "Dán", Chung_Loai=Dán, Don_Vi=Con, Ma_Hang=MH005259, So_Chan=2, Ten_Linh_Kien="Trở 0805 5% 220R"
Tn1 Tn2 Tn3: library part CON3, "Connector"
Tn4: "Connector"
U1Mb: library part DS36F95, "DIFFERENTIAL BUS TRANSCEIVERS"
Ulr: "Ra-02 LoRa RF M5Stack Platform Evaluation Expansion Board", Package=None, Availability=Unavailable, MP=RA-02_LORA, Price=None
Un1: "AOZ1282"
Ln1: Code_IEC=1005, Code_JEITA=0402, LatestRevisionDate=29-May-2009, LatestRevisionNote="IPC-7351 Footprint Added.", PackageDescription="Chip Inductor", PackageReference=0402-A, Published=8-Jun-2000, Publisher="Altium Limited"

## Via types
v1: diameter 50, hole 28, Top Layer to Bottom Layer, 25 vias
v2: diameter 30, hole 15, Top Layer to Bottom Layer, 20 vias

## Nets (pads, with @x,y where several pads share a name; then routed paths per layer and width w, separated by ;. In a path a pad name is that pad's centre, name@x,y a point inside that pad or via, vN(x,y) a via of type N, cw(c..) or ccw(c..) an arc to the next point about the centre after c; other vN are vias at no path point)
+24: Cbv2.1 Cbv3.1 Lbv1.2 Re4Mb.1 Re5Mb.1 Rn2.1 Tn4.3 Un1.5 | length 2799.4
  Top Layer w20: Rn2.1 2055,3500 2097.4,3542.4 Un1.5 2140.59,3542.4 2148.19,3550 2152.43,3550 2213.71,3611.29 2213.71,3703.44 2275,3764.72 2352.87,3764.72 2368.14,3780 2607.29,3780 2701.79,3874.5 2709.5,3874.5 Cbv3.1
  Top Layer w40: Re5Mb.1 1890,2440 Re4Mb.1 1888,2570 1785,2673 1785,3047.43 1813.28,3075.71 1823.71,3075.71 1855,3107 Tn4.3 1855,3163 2000,3308 Rn2.1 ; Lbv1.2 2605,4085 2717.5,4197.5 2760,4197.5 Cbv2.1@2770,4207.5 ; Cbv2.1 Cbv2.1@2770,4207.5 ; Cbv3.1 2820,3992.85 2770,4042.85 Cbv2.1@2770,4207.5
A: ARDUINO_MINI_PRO.5 Htds.3 P2.5 | length 503.8
  Top Layer w20: ARDUINO_MINI_PRO.5 4132.47,2484.28 4132.47,2442.47 P2.5 4125,2340 Htds.3@4283.44,2181.56
COM1: Prl1.2 RL1.1 | length 821.8
  Top Layer w20: RL1.1 5571.22,2368.78 Prl1.2
COM2: Prl2.2 RL2.1 | length 795.8
  Top Layer w20: Prl2.2 5341.22,4383.78 RL2.1
COM3: Prl3.2 RL3.1 | length 158.8
  Top Layer w20: RL3.1 4683.78,4398.78 Prl3.2
DIO0: ARDUINO_MINI_PRO.A0 P1.8 Pulr1.4 Ulr.5 | length 1602.3
  Top Layer w20: Ulr.5 3471.38,4035.63 3483.03,4023.98 3483.03,4016.83 3513.03,3986.83 3513.03,3932.47 3760.12,3685.39 3760.12,3673.82 4007.2,3426.73 4018.77,3426.73 v2(4082.88,3362.62) ; P1.8 4170,3224.49 ARDUINO_MINI_PRO.A0
  Top Layer w40: Pulr1.4 3245,3910 3368.98,4033.98 3440.2,4033.98 Ulr.5
  Bottom Layer w20: v2(4082.88,3362.62) 4084.8,3360.71 4114.29,3360.71 P1.8
GND: AMS1.1 ARDUINO_MINI_PRO.GND Cbv1.2 Cbv2.2 Cbv3.2 Cha1.2 Cha2.2 Cn3.2 Cn4.2 CnAr.2 CnAs.2 CnLr.2 CnMb1.2 CnMb.2 CnPH.2 CnRe.2 CnRl.2 CnSCD.2 CnTDS.2 CnTr.2 Dbv1.1 Dn.1 Hph.2 Hph.3 Htds.1 Jas.2 Jn.2 Jre.2 Jrev.3 Jscd.1 Jtr.3 KF1.2 LED.2 Ln_5V.2 LnLr.2 LnMb.2 P1.2 P2.9 P4.3 Ptr1.1 Pulr1.7 Pulr1.8 Pulr2.1 Pulr2.8 Q1.2 Q2.2 Q3.2 Q4.2 R5Mb2.1 Re2Mb.1 Rn1.1 Rn3.1 Rn4.1 Tn2.2 U1Mb.5 Ulr.1 Ulr.2 Ulr.9 Ulr.16 Un1.2 | length 10864.3
  Top Layer w20: LnMb.2 2110,2122.5 2139.96,2152.46 CnMb.2 ; Un1.2 2372,3542 Dn.1 ; CnMb1.2 2540.1,1704.9 2699.9,1704.9 U1Mb.5 2728,1705 2785,1762 Hph.2 ; P1.2 3626.64,3248.36 3626.64,3177.3 ARDUINO_MINI_PRO.GND@3635.51,3168.43 ; ARDUINO_MINI_PRO.GND@4619.76,2873.15 4686.98,2940.37 4686.98,2966.98 P4.3 ; v1@5440,925 v1(5445,925)
  Top Layer w40: Jn.2 2230.86,4415 2235.86,4420 2450,4420 KF1.2 Cbv2.2 3094.84,4335 3119.84,4310 Pulr1.8 Pulr1.7 ; LnMb.2 2115,2115 v1(2225,2115) ; CnMb.2 2143,2253.04 2143,2605 2202,2664 2202,2677 2245,2720 Re2Mb.1 ; Dbv1.1 2263.28,3853.28 2345.28,3853.28 Cbv1.2@2380,3888 ; Cbv1.2 Cbv1.2@2380,3888 ; v1(2450,3480) 2450,3495 2390,3555 Dn.1 ; v1(2455,3830) 2438,3830 Cbv1.2@2380,3888 ; R5Mb2.1 v1(2615,1420) ; Rn4.1 2683,3735 2678,3730 2678,3723.57 2634.43,3680 2548.21,3680 2528.21,3700 Rn3.1 2435,3610 2390,3565 Dn.1 ; Cn4.2 Cn3.2 2555,3547.5 2545,3557.5 2534.07,3557.5 2531.57,3560 Dn.1 ; Hph.2 Hph.3 ; Hph.3@2867.57,2193.65 CnPH.2 2867.57,2418.8 2871.2,2422.43 2907.35,2422.43 3151.72,2666.79 3151.72,2669.22 3185,2702.5 Ln_5V.2 3265,2705 v1(3270,2700) ; Cbv3.2 2975.55,3990.55 2975.55,4060.55 Pulr1.7 ; Cha1.2 3001.2,3461.24 3001.2,3450.06 3005.55,3445.71 AMS1.1 3005.55,3332.24 3064.17,3273.62 3106.38,3273.62 Cha2.2 3110,3335 v1(3140,3365) ; CnLr.2 3282.43,3842.57 v1(3285,3840) ; CnAr.2 3402.19,2994.8 3428.18,3020.79 ARDUINO_MINI_PRO.GND@3438.66,3020.79 ; CnRe.2 3434.17,973.98 3434.17,746.02 Jrev.3 3433.15,721.37 3488.73,665.79 3750.79,665.79 Jre.2 ; ARDUINO_MINI_PRO.GND@3438.66,3119.21 ARDUINO_MINI_PRO.GND@3438.66,3020.79 ; Ulr.2 3442.17,4271.85 3443.82,4273.5 3443.82,4348.94 Ulr.1@3445.47,4350.59 ; Ulr.1@3442.83,4355 3302.25,4355 3160.89,4213.65 3128.65,4213.65 Pulr1.7 ; Ulr.1 Ulr.16 4159.41,4350.59 Pulr2.1 ; ARDUINO_MINI_PRO.GND@3635.51,3168.43 3559.15,3092.07 3509.94,3092.07 ARDUINO_MINI_PRO.GND@3438.66,3020.79 ; LnLr.2 3710,3647.5 3760,3597.5 v1(3760,3580) ; P2.9 3728.65,2438.65 3728.65,2474.16 ARDUINO_MINI_PRO.GND@3832.36,2577.87 ; CnTDS.2 3970,2059.36 4028.71,2118.07 4033.07,2118.07 Htds.1 ; Ulr.9 4077.68,3799.41 4079.33,3797.76 4079.33,3768.23 4080,3767.56 4080,3606.2 4092.69,3606.2 4096.5,3610 Pulr2.8 ; v1(4530,2145) 4540.77,2145 4576.2,2109.57 Q3.2 ; P4.3 4760.16,3035 4810.16,3085 v1(4825,3085) ; Q4.2 4769.57,3448.8 4810.77,3490 v1(4825,3490) ; v1(5005,3210) 5005,3232.66 5056.2,3283.86 Q2.2 ; LED.2 5230,2762.5 5235,2767.5 5256.96,2767.5 5262.6,2773.13 v1(5265.3,2773.13) ; CnTr.2 5389.8,1973.94 5425.87,2010 v1(5455,2010) ; Q1.2 5422.07,1002.52 5422.07,942.93 v1@5440,925 ; CnAs.2@5420.93,2797.43 CnAs.2 5428.8,2797.43 5492.49,2733.74 5591.21,2733.74 5608.78,2751.31 5608.78,2758.78 5615,2765 5615,2817.51 5591.21,2841.3 5582.01,2841.3 5557.05,2866.26 Jas.2 ; CnSCD.2 5438.8,3282.43 5469.62,3251.61 5494.65,3251.61 Jscd.1
  Bottom Layer w40: v1(4825,3085) 4948.09,3208.09 5003.09,3208.09 v1(5005,3210)
LED: ARDUINO_MINI_PRO.8 P2.2 RLED.2 | length 656.9
  Top Layer w20: P2.2 4432.47,2442.47 4432.47,2489.01 ARDUINO_MINI_PRO.8 4703.46,2760 RLED.2
MISO: ARDUINO_MINI_PRO.12 P1.10 Pulr2.4 Ulr.13 | length 1194
  Top Layer w20: Ulr.13 4077.68,4114.37 4129.31,4062.74 4147.26,4062.74 Pulr2.4 4210.57,4010 4246.33,3974.24 4270.76,3974.24 4300,3945 4300,3618.99 4421.38,3497.62 4421.38,3356.38 4373.32,3308.32 4370,3308.32 4370,3228.56 4422.91,3175.65 ARDUINO_MINI_PRO.12
MOSI: ARDUINO_MINI_PRO.11 P1.11 Pulr2.3 Ulr.14 | length 1261
  Top Layer w20: Ulr.14 4077.68,4193.11 4153.31,4117.47 4192.53,4117.47 Pulr2.3 4330,3980 4330,3631.42 4451.38,3510.04 4451.38,3369.33 4462.53,3358.18 4462.53,3312.47 P1.11 4470,3230.14 4521.34,3178.8 ARDUINO_MINI_PRO.11
NetCbv1_1: Cbv1.1 Dbv1.2 Fbv.1 Lbv1.1 | length 616.8
  Top Layer w40: Fbv.1 2078.39,4004.65 2084.76,4011.02 2084.76,4019.28 2108.2,4042.71 2204.45,4042.71 Dbv1.2 2354.83,4007.17 2380,3982 Cbv1.1 2485,3980 2555,3910 Lbv1.1
NetCn1_1: Cn1.1 Un1.1 | length 128.5
  Top Layer w20: Cn1.1 2237.5,3382.5 2237.5,3505 Un1.1
NetCn1_2: Cn1.2 Dn.2 Ln1.1 Un1.6 | length 758.3
  Top Layer w20: Un1.6 2137.5,3505 2137.5,3387.5 Cn1.2 2147,3380 2240,3287 2240,3125 2295,3180 2295,3290 2390,3385 Dn.2
NetCn2_2: Cn2.2 Rn3.2 Rn4.2 Rn5.2 Un1.3 | length 870.5
  Top Layer w20: Un1.3 2250,3580 2328,3658 2328,3685 2343,3700 Rn3.2 2347,3700 2392,3745 2585,3745 2590,3750 2619.72,3750 2649.72,3780 2802,3780 2850,3732 Rn5.2 Cn2.2
NetDbv2_2: Dbv2.2 Fbv.2 | length 217.2
  Top Layer w40: Dbv2.2 2034.65,3830 Fbv.2
NetDn1_2: Dn1.2 Ptr1.2 | length 890.9
  Top Layer w40: Dn1.2 1900,1377.4 1850,1327.4 1850,950 Ptr1.2
NetDrl1_1: Drl1.1 Q3.3 RL1.4 | length 778
  Top Layer w20: Q3.3 4732.91,2010.79 RL1.4 4854.69,2136.98 5035,2317.29 v2(5035,2320)
  Bottom Layer w20: v2(5035,2320) 5115,2400 5115,2405 5145,2435 Drl1.1
NetDrl2_1: Drl2.1 Q2.3 RL2.4 | length 1127.6
  Top Layer w20: Q2.3 5146.71,3185.79 v2(5206.5,3245.57)
  Bottom Layer w20: v2(5206.5,3245.57) 5567.42,3606.5 5567.42,3679.67 RL2.4 5382.13,3885 Drl2.1
NetDrl3_1: Drl3.1 Q4.3 RL3.4 | length 1247.8
  Top Layer w20: RL3.4 4447.56,3862.67 4520,3790.23 4520,3483.62 4548.62,3455 4625.87,3455 4657.16,3423.7 4657.16,3416.93 4663.9,3410.2 Q4.3
  Bottom Layer w20: RL3.4 4535,4082.56 4535,3860
NetLED_1: LED.1 RLED.1 | length 130
  Top Layer w20: RLED.1 LED.1
NetLn_5V_1: Ln_5V.1 Rln_5V.1 | length 115.4
  Top Layer w40: Rln_5V.1 2992,2730 3017,2705 Ln_5V.1
NetLnLr_1: LnLr.1 RlnLr.1 | length 125
  Top Layer w20: RlnLr.1 LnLr.1
NetLnMb_1: LnMb.1 RLnMb.1 | length 137.1
  Top Layer w20: RLnMb.1 1887.5,2117.5 2017.5,2117.5 LnMb.1
NetLtr1_1: Ltr1.1 Rtr1.2 | length 239.1
  Top Layer w40: Rtr1.2 5410,1868.94 5523.1,1982.03 5587.03,1982.03 Ltr1.1
NetLtr1_2: Ltr1.2 Ltr2.1 | length 115
  Top Layer w20: Ltr2.1 Ltr1.2
NetLtr2_2: Ltr2.2 Ltr4.2 Q1.3 | length 814.3
  Top Layer w10: Ltr2.2 5595,1564.96 5655,1504.96 5655,1200 Ltr4.2
  Top Layer w20: Q1.3 5559.21,1104.21 Ltr4.2
NetLtr3_1: Ltr3.1 Rtr2.2 | length 179.5
  Top Layer w40: Rtr2.2 5550.47,1465 5585.47,1500 Ltr3.1
NetLtr3_2: Ltr3.2 Ltr4.1 | length 156.2
  Top Layer w20: Ltr3.2 5597.5,1392.5 5597.5,1257.5 Ltr4.1
NetPrl1_1: Prl1.1 RL1.2 | length 277.8
  Top Layer w20: RL1.2 5352.28,2605 5407.28,2550 Prl1.1
NetPrl1_3: Prl1.3 RL1.3 | length 265.1
  Top Layer w20: RL1.3 5565.5,2125 Prl1.3
NetPrl2_1: Prl2.1 RL2.2 | length 238.3
  Top Layer w20: RL2.2 5105,4380 Prl2.1
NetPrl2_3: Prl2.3 RL2.3 | length 267.6
  Top Layer w20: Prl2.3@5530.5,4415 5530.5,4242.78 5585,4188.28 RL2.3
NetPrl3_1: Prl3.1 RL3.2 | length 893.4
  Top Layer w20: Prl3.1 4519.37,4375.63 4519.37,4241.58 4920,3840.95 RL3.2
NetPrl3_3: Prl3.3 RL3.3 | length 965.1
  Bottom Layer w20: RL3.3 4440,3716.74 4468.68,3745.42 4468.68,3748.28 4480.4,3760 4588.28,3760 4610,3781.72 4610,3890 4763.78,4043.78 4763.78,4268.44 4890.5,4395.16 Prl3.3
NetQ1_1: Q1.1 Rtr3.2 | length 250.4
  Top Layer w20: Rtr3.2 5208.62,1038.43 5243.43,1038.43 v2(5245,1040) ; Q1.1 5344,1005 5344,951 v2(5345,950)
  Bottom Layer w20: v2(5245,1040) 5335,950 v2(5345,950)
NetQ2_1: Q2.1 R1rl2.2 | length 276
  Top Layer w20: R1rl2.2 5196.57,3410 5236.72,3369.85 5236.72,3353.28 5178.73,3295.3 5138.73,3295.3 5132,3288.57 Q2.1
NetQ3_1: Q3.1 R1rl1.2 | length 141.3
  Top Layer w20: R1rl1.2 4632,2240 4647,2225 4647,2223 4652,2218 Q3.1
NetQ4_1: Q4.1 R1rl3.2 | length 154.6
  Top Layer w20: Q4.1 4865,3373 4905,3413 R1rl3.2
NetRe1Lr_2: Re1Lr.2 Re2Lr.1 Tn1.1 | length 604.2
  Top Layer w20: Re2Lr.1 3230,3448 3215,3463 Tn1.1 3215,3477 3253,3515 3468,3515 3553,3430 Re1Lr.2
NetRe1Mb_2: Re1Mb.2 Re2Mb.2 Tn2.1 | length 331.4
  Top Layer w20: Re2Mb.2 2335,2727 2280,2672 Tn2.1 2280,2658 2288,2650 2295,2650 2315,2630 Re1Mb.2
NetRe3Mb_1: Re3Mb.1 Tn2.3 | length 188.5
  Top Layer w20: Tn2.3 2240,2558 2290,2508 2290,2475 Re3Mb.1@2345,2420
NetRe3Mb_2: Re3Mb.2 Re4Mb.2 Re5Mb.2 Tn4.1 | length 1110.3
  Top Layer w20: Re5Mb.2 2045,2460 v2(2045,2505) ; v2(2188,2425) Re3Mb.2
  Top Layer w40: Re5Mb.2 2005,2545 1987,2563 1987,2604.57 2105,2722.57 2105,3047.43 2047.43,3105 Tn4.1@2037,3105
  Bottom Layer w20: v2(2045,2505) 2084.32,2465.68 2089.32,2465.68 2130,2425 v2(2188,2425)
NetRen1_2: Ren1.2 Ren2.1 Tn3.1 | length 389.5
  Top Layer w20: Ren2.1 2803.72,2950 2818.72,2935 2890.28,2935 2917,2961.72 2917,2972 Tn3.1 2998,2980 3043,2935 Ren1.2
NetRn1_2: Rn1.2 Rn2.2 Un1.4 | length 343.5
  Top Layer w20: Rn1.2 1825,3512 1840,3527 1842,3527 1905,3590 2062.5,3590 2072.5,3580 Un1.4
NSS: ARDUINO_MINI_PRO.10 P1.12 Pulr2.2 Ulr.15 | length 1399.9
  Top Layer w20: Ulr.15 4138.15,4271.85 Pulr2.2 4360,4050 4360,3649.62 4481.38,3528.24 4481.38,3381.76 4493.09,3370.04 4504.96,3370.04 P1.12 4570,3218.19 ARDUINO_MINI_PRO.10
OUT: ARDUINO_MINI_PRO.4 Jre.1 Jrev.1 P2.6 Rrev.1 | length 2083.8
  Top Layer w20: Jrev.1 3730,745 3835,850 Rrev.1@3835,990 ; Rrev.1 3837,1005 3883.09,1051.09 3883.09,1063.09 v2(3885,1065) ; P2.6 4032.47,2442.47 4032.47,2482.71 ARDUINO_MINI_PRO.4
  Bottom Layer w20: v2(3885,1065) 3885,2295 P2.6
Po: ARDUINO_MINI_PRO.3 Hph.4 P2.7 | length 1341.3
  Top Layer w20: P2.7 3977.86,2487.86 3977.86,2526.53 ARDUINO_MINI_PRO.3
  Bottom Layer w20: Hph.4 3299.53,2484.53 3445.51,2484.53 3475,2455.04 3475,2414.96 3504.49,2385.47 3875.47,2385.47 P2.7
PowEn1: ARDUINO_MINI_PRO.A2 P1.6 Re1Lr.1 | length 537.9
  Top Layer w20: Re1Lr.1 3845,3430 P1.6 4026.64,3248.36 4026.64,3171 ARDUINO_MINI_PRO.A2
PowEn2: ARDUINO_MINI_PRO.7 P2.3 Re1Mb.1 | length 2160
  Top Layer w27: Re1Mb.1 2604.19,2630 2624.19,2610 v2(2625,2610) ; P2.3 4331.13,2441.13 4331.13,2486.09 ARDUINO_MINI_PRO.7
  Bottom Layer w27: v2(2625,2610) 2655,2580 2845,2580 2877.5,2547.5 3429.92,2547.5 3462.41,2515 4360.04,2515 ARDUINO_MINI_PRO.7
PowEn3: ARDUINO_MINI_PRO.A3 P1.5 Ren1.1 | length 1171
  Top Layer w20: Ren1.1 3150,2920 3177.29,2920 3187.29,2910 v2(3190,2910) ; v2(3214.03,3014.03) 3296.79,3096.79 3306.79,3096.79 v2(3395,3185) ; P1.5 3926.64,3248.36 3926.64,3172.58 ARDUINO_MINI_PRO.A3
  Bottom Layer w20: v2(3190,2910) 3214.03,2934.03 v2(3214.03,3014.03) ; v2(3395,3185) 3400,3185 3442.8,3227.8 3871.42,3227.8 ARDUINO_MINI_PRO.A3
RAW: ARDUINO_MINI_PRO.RAW P1.1 | length 164.4
  Top Layer w20: P1.1 3537.09,3237.91 ARDUINO_MINI_PRO.RAW
RL1: ARDUINO_MINI_PRO.9 P2.1 R1rl1.1 | length 383.3
  Top Layer w20: R1rl1.1 4532.5,2247.5 4532.5,2427.5 P2.1 4576.53,2486.53 4576.53,2523.01 4619.76,2566.25 ARDUINO_MINI_PRO.9
RL2: ARDUINO_MINI_PRO.A6 P4.2 R1rl2.1 | length 644.7
  Top Layer w20: ARDUINO_MINI_PRO.A6 4747.53,3099.34 4747.53,3127.53 P4.2 ; v2(5015,3340) 5040,3365 R1rl2.1
  Bottom Layer w20: P4.2 4762.23,3142.23 4817.23,3142.23 v2(5015,3340)
RL3: ARDUINO_MINI_PRO.A7 P4.1 R1rl3.1 | length 408.3
  Top Layer w20: ARDUINO_MINI_PRO.A7 4683.6,3133.83 4683.6,3163.6 P4.1 4845,3325 R1rl3.1
RS: ARDUINO_MINI_PRO.A1 P1.7 Pulr1.5 Ulr.4 | length 1683.4
  Top Layer w20: Ulr.4 3471.38,4114.37 3483.03,4102.72 3483.03,4089 3494.75,4077.28 3501.32,4077.28 3513.03,4065.57 3513.03,4029.25 3543.03,3999.25 3543.03,3951.97 3790.12,3704.88 3790.12,3686.24 4019.63,3456.73 4038.27,3456.73 4117.88,3377.12 4117.88,3348.12 4074.76,3305 P1.7 4070,3226.06 ARDUINO_MINI_PRO.A1
  Top Layer w40: Pulr1.5 3130.16,4010 3150.16,3990 3254.29,3990 3351.57,4087.28 3385.24,4087.28 3413.98,4116.02 Ulr.4@3443.37,4116.02
RS485A2: Ptr1.4 R4Mb2.2 R6Mb2.2 U1Mb.6 | length 1287.1
  Top Layer w20: Ptr1.4 2327,1265 2345,1247 R4Mb2.2 R6Mb2.2 2720,1247 2790,1317 2790,1593 2729.31,1653.69 2701.31,1653.69 U1Mb.6
RS485B2: Ptr1.3 R5Mb2.2 R6Mb2.1 U1Mb.7 | length 1272.7
  Top Layer w20: v2(2430,1300) 2495,1300 2508,1313 2510,1313 2525,1328 R5Mb2.2 2527.5,1332.5 2717.5,1332.5 R6Mb2.1 2720,1441.96 2760,1481.96 2760,1573 2728,1605 U1Mb.7
  Bottom Layer w20: Ptr1.3 2275,1065 2430,1220 v2(2430,1300)
RST: ARDUINO_MINI_PRO.RST P1.3 P2.10 | length 941.6
  Top Layer w20: P2.10 3680.23,2490.23 3680.23,2524.16 ARDUINO_MINI_PRO.RST@3733.94,2577.87 ; P1.3 3726.64,3248.36 3726.64,3175.73 ARDUINO_MINI_PRO.RST@3733.94,3168.43
  Bottom Layer w20: ARDUINO_MINI_PRO.RST@3733.94,2577.87 ARDUINO_MINI_PRO.RST@3733.94,3168.43
SCK: ARDUINO_MINI_PRO.13 P1.9 Pulr2.5 Ulr.12 | length 1112.9
  Top Layer w20: Ulr.12 4077.68,4035.63 4200,3913.31 Pulr2.5 4270,3840 4270,3600.49 4391.38,3479.11 4391.38,3403.55 4357.87,3370.04 4335.04,3370.04 P1.9 4270,3222.91 ARDUINO_MINI_PRO.13
SCL: ARDUINO_MINI_PRO.A5 Jas.3 Jscd.3 P4.5 Rscl.1 | length 2301.3
  Top Layer w20: ARDUINO_MINI_PRO.A5 4167.8,2783.78 4656.78,2783.78 4663,2790 4710,2790 P4.5 5002,2835 5075,2908 5152,2908 v2(5155,2905)
  Bottom Layer w20: v2(5155,2905) 5515,2905 Jas.3 5598.78,2988.78 5598.78,3304.96 Jscd.3
SDA: ARDUINO_MINI_PRO.A4 Jas.4 Jscd.4 P4.4 Rsda.1 | length 2278
  Top Layer w20: ARDUINO_MINI_PRO.A4 4236.22,2813.78 4644.36,2813.78 4747.53,2916.95 4747.53,2927.53 P4.4 4762.47,2942.47 4789.47,2942.47 4910,3063 Rsda.1 v2(4990,3065) ; Jas.4 5610,3078.74 5610,3405 5592.79,3422.21 5560.27,3422.21 Jscd.4
  Bottom Layer w20: v2(4990,3065) 5513.74,3065 Jas.4
TX: ARDUINO_MINI_PRO.6 Jtr.1 P2.4 Rtr3.1 | length 2648.6
  Top Layer w20: ARDUINO_MINI_PRO.6 4232.47,2485.86 4232.47,2442.47 P2.4 4455.43,2204.57 4455.43,1684.9 5161.58,978.75 5162.31,978.75 5191.06,950 Rtr3.1 5198.94,950 5241.27,907.67 5241.27,894.16 5386.77,748.66 5386.77,672.52 5423.51,635.79 5459.64,635.79 5485.2,661.34 5485.2,693.28 5496.91,705 Jtr.1
U1ENo: ARDUINO_MINI_PRO.2 P2.8 R3Mb2.2 U1Mb.2 U1Mb.3 | length 1708.3
  Top Layer w20: U1Mb.2 U1Mb.3 3131.74,1655 3136.74,1650 3358,1650 3493,1785 3583.64,1785 3825,2026.36 P2.8 3878.65,2488.65 3878.65,2525.74 ARDUINO_MINI_PRO.2
U1RXo: ARDUINO_MINI_PRO.RX P2.11 R1Mb2.2 U1Mb.1 | length 1791.5
  Top Layer w20: U1Mb.1 v2(2985,1555) ; ARDUINO_MINI_PRO.RX@3438.66,2823.94 3624.27,2638.33 3624.27,2589.11 3635.51,2577.87 3581.01,2523.38 3581.01,2491.01 P2.11 3525,2289.07 3552,2262.07 3552,2005 3512,1965 3508,1965 3456.63,1913.63 3456.63,1886.9 v2(3454.71,1884.99)
  Bottom Layer w20: v2(2985,1555) 3065,1555 3394.99,1884.99 v2(3454.71,1884.99)
U1TXo: ARDUINO_MINI_PRO.TX P2.12 R2Mb2.2 U1Mb.4 | length 1535.4
  Top Layer w20: U1Mb.4 2920.77,1705.77 2978.06,1705.77 2982.29,1710 v2(2985,1710) ; ARDUINO_MINI_PRO.TX@3438.66,2725.51 3525.85,2638.33 3525.85,2589.11 3537.09,2577.87 3481.8,2522.59 3481.8,2491.8 P2.12 3425,2238 3503,2160 R2Mb2.2 3505,2085 v2(3455,2035)
  Bottom Layer w20: v2(2985,1710) 2990,1705 3170.88,1705 3379.82,1913.94 3379.82,1959.82 v2(3455,2035)
V+: Dbv2.1 Jn.1 KF1.1 | length 651.7
  Top Layer w40: Dbv2.1 1825,4005 1989,4169 Jn.1 2034.5,4178.5 2178.5,4178.5 KF1.1
VCC: AMS1.3 ARDUINO_MINI_PRO.VCC Cha1.1 Cn2.1 Cn3.1 Cn4.1 CnAr.1 Ln1.2 P1.4 Ren2.2 Rn5.1 Tn3.2 | length 3079.6
  Top Layer w20: P1.4 3826.64,3248.36 3826.64,3174.15 ARDUINO_MINI_PRO.VCC@3832.36,3168.43
  Top Layer w40: Ln1.2@2455,3125 2455,3160 2555,3260 Cn3.1 Cn4.1 2725,3407.5 2735,3397.5 2813.05,3397.5 AMS1.3@2824.45,3386.1 ; Tn3.2 Tn3.2@2845,2983 ; Rn5.1 Rn5.1@2850,3638 ; Cha1.1 2922.77,3460.93 2919.15,3457.31 2895.65,3457.31 AMS1.3@2824.45,3386.1 ; Cn2.1 2875,3615 2857,3633 2855,3633 Rn5.1@2850,3638 ; ARDUINO_MINI_PRO.VCC@3832.36,3168.43 3586.3,2922.36 3438.66,2922.36 3437.48,2921.18 3276.18,2921.18 CnAr.1 3271.38,2923.62 3240.8,2923.62 3129.43,3035 2894.57,3035 2875.28,3015.71 2875.28,3013.28 Tn3.2@2845,2983 ; AMS1.3@2824.45,3386.1 2824.45,3612.45 Rn5.1@2850,3638 ; AMS1.3@2824.45,3386.1 AMS1.3 2824.45,3332.24 2705,3212.8 Ren2.2 2821.57,3040 2845,3016.57 Tn3.2@2845,2983
VCC_3.3V: AMS1.2 AMS1.4 Cha2.1 Re2Lr.2 Tn1.2 | length 897
  Top Layer w40: AMS1.2 AMS1.4 3041.69,3130.83 3106.06,3195.2 Cha2.1 3113.94,3195.2 3129.13,3180 Re2Lr.2 3230,3182 3261,3213 3267.43,3213 3295,3240.57 Tn1.2
VCC_5V: CnAs.1 CnMb1.1 CnPH.1 CnRe.1 CnRl.1 CnSCD.1 CnTDS.1 CnTr.1 Drl1.2 Drl2.2 Drl3.2 Hph.1 Htds.2 Jas.1 Jre.3 Jrev.2 Jscd.2 Jtr.2 R1Mb2.1 R2Mb2.1 R3Mb2.1 R4Mb2.1 RL1.5 RL2.5 RL3.5 Rln_5V.2 Rrev.2 Rscl.2 Rsda.2 Rtr1.1 Rtr2.1 Tn3.3 U1Mb.8 | length 15205.5
  Top Layer w20: CnMb1.1 2597.56,1630 2672.56,1555 U1Mb.8
  Top Layer w40: R4Mb2.1 2345,1438.94 2536.06,1630 CnMb1.1 ; CnMb1.1@2532.44,1633.62 2521.38,1633.62 2503.82,1651.18 2500.01,1651.18 2470,1681.2 2470,2088.16 2685,2303.16 ; Hph.1 2685,2303.16 ; Rln_5V.2 Rln_5V.2@2898,2730 ; v1(3525,1050) 3525,1047.29 3513.62,1035.92 3513.62,978.62 CnRe.1 3510,883.29 3531.57,861.71 Jrev.2@3531.57,770.59 ; Jrev.2 Jrev.2@3531.57,770.59 ; v1(3595,1860) 3592.29,1860 3572.29,1840 3455.57,1840 3438,1822.43 3438,1816 3407,1785 R3Mb2.1 3407.5,1787.5 3407.5,1962.5 3410,1965 3408,1965 3400,1973 3400,2165 3350,2215 v1(3350,2860) 3128.5,2860 3108.5,2880 Tn3.3 2885,2743 Rln_5V.2@2898,2730 ; 3738,977.02 Jrev.2@3531.57,770.59 ; Rrev.2 3747,1005 3778,1036 3778,1042.43 3845.57,1110 3903.64,1110 3985,1028.64 Jre.3 ; v1(3840,1895) 3842.71,1895 3867.71,1920 CnTDS.1 ; CnTDS.1@3973.94,1920 3995.12,1941.18 4009.99,1941.18 4029.7,1960.9 4029.7,2048.35 4049.42,2068.07 4088.49,2068.07 4190,2169.58 Htds.2 ; v1(4020,3520) 4022.71,3520 4026.86,3524.15 4081.51,3524.15 CnRl.1 4088.76,3524.15 4092.69,3524.15 4146.84,3470 v1@4343.37,3470 ; Rscl.2 5070,3005 5070,3007 5036.92,3040.08 5036.92,3081.72 4996.64,3122 4941,3122 4910,3153 Rsda.2 4910,3157 4915,3162 4915,3234.39 4970,3289.39 4970,3435.79 5103.89,3569.68 5103.89,3688.58 RL2.5 ; v1(5210,3595) 5290.04,3514.96 5290.04,3457.68 5386.87,3360.85 5431.24,3360.85 CnSCD.1 ; v1(5240,2080) 5311.38,2008.62 5311.38,1973.62 CnTr.1 5315,1966.06 5335.2,1945.87 Rtr1.1 5335.2,1483.94 5290,1438.74 5290,911.57 5440.19,761.38 5440.19,706.39 Jtr.2 ; v1(5320,2715) 5352.44,2747.44 5352.44,2818.61 5384.88,2851.05 5399.75,2851.05 5420.93,2872.23 CnAs.1 ; Jas.1 5473.91,2868.61 5428.49,2868.61 CnAs.1 ; Jscd.2 5471.39,3353.61 5438.49,3353.61 CnSCD.1 ; 2685,2303.16 2792.77,2410.93 CnPH.1 2792.77,2622.77 2893,2723 2893,2725 Rln_5V.2@2898,2730 ; CnAs.1 5424.87,3186.14 5377.31,3233.7 5377.31,3318.47 5394.88,3336.05 5409.75,3336.05 5430.93,3357.23 CnSCD.1
  Bottom Layer w40: v1(3350,2860) 3350,3286.48 3583.52,3520 v1(4020,3520) ; v1(3525,1050) 3595,1120 v1(3595,1860) 3735,1860 3768.09,1893.09 3838.09,1893.09 v1(3840,1895) ; v1(4346.38,3460) Drl3.2@4706.38,3820 ; Drl3.2 Drl3.2@4706.38,3820 ; RL3.5 4920,4033.62 Drl3.2@4706.38,3820 ; RL2.5 5100,3694.68 5100,3880 Drl2.2 ; v1(5210,3595) 5210,3775 5100,3885 Drl2.2 ; v1(5240,2080) 5238.09,2081.91 5209.45,2081.91 4854.69,2436.68 RL1.5 4876.33,2605 4941.33,2670 Drl1.2 5272.29,2670 5317.29,2715 v1(5320,2715) ; Drl3.2@4706.38,3820 4952.97,3820 4980.31,3847.34 4980.31,3851.25 5003.75,3874.68 5084.69,3874.68 Drl2.2
VCCLr: CnLr.1 Pulr1.6 RlnLr.2 Tn1.3 Ulr.3 | length 1356.8
  Top Layer w20: 3255,3641 3396,3641 RlnLr.2
  Top Layer w40: Pulr1.6 3127.96,4110 3207.96,4190 Ulr.3@3445.47,4190 ; CnLr.1@3215,3760 3215,3681 3255,3641 Tn1.3 ; CnLr.1 3307.23,3767.77 3310,3765 v1(3315,3765) ; Ulr.3@3418.62,4191.89 3421.97,4195.24 Ulr.3@3446.41,4195.24
  Bottom Layer w40: Pulr1.6 3241.57,4110 3340,4011.57 3340,3792.71 3315,3767.71 v1(3315,3765)
VMb: CnMb.1 Dn1.1 RLnMb.2 Tn4.2 | length 2011.9
  Top Layer w40: Dn1.1 1900,1875 1830,1945 1830,2154.43 1847.57,2172 1854,2172 1885,2203 RLnMb.2 1965.04,2205 2085,2324.96 2085,2466.36 2090,2471.36 2090,2636.86 2152,2698.86 2152,2702.43 2155,2705.43 2155,3125.43 2065.43,3215 2004.57,3215 1985,3195.43 1985,2925 Tn4.2
pads on no net: ARDUINO_MINI_PRO.DTR J1. J2. J3. J4. J5. J6. J7. J8. Jn.3 Pulr1.1 Pulr1.2 Pulr1.3 Pulr2.6 Pulr2.7 Ulr.6 Ulr.7 Ulr.8 Ulr.10 Ulr.11

## Polygon pours and split planes (outlines as drawn)
GND on Top Layer "GND_L01_P000" (solid, pour order 0): 1750,4495 1750,565 5670,565 5675,570 5675,4495

## Keep-outs
Keep-Out Layer:
  the board outline again, w10